# Altium PCB Ups chg.PcbDoc
Units mm, origin at the board's own origin, x right, y up, seen from the top; angles counter-clockwise.
Board outline 41.88 x 53.38 mm, 2 copper layers (Top Layer, Bottom Layer); 29 components, 19 nets, 105 pads, 20 vias.
Unrouted connection lines stored in the file: 1.
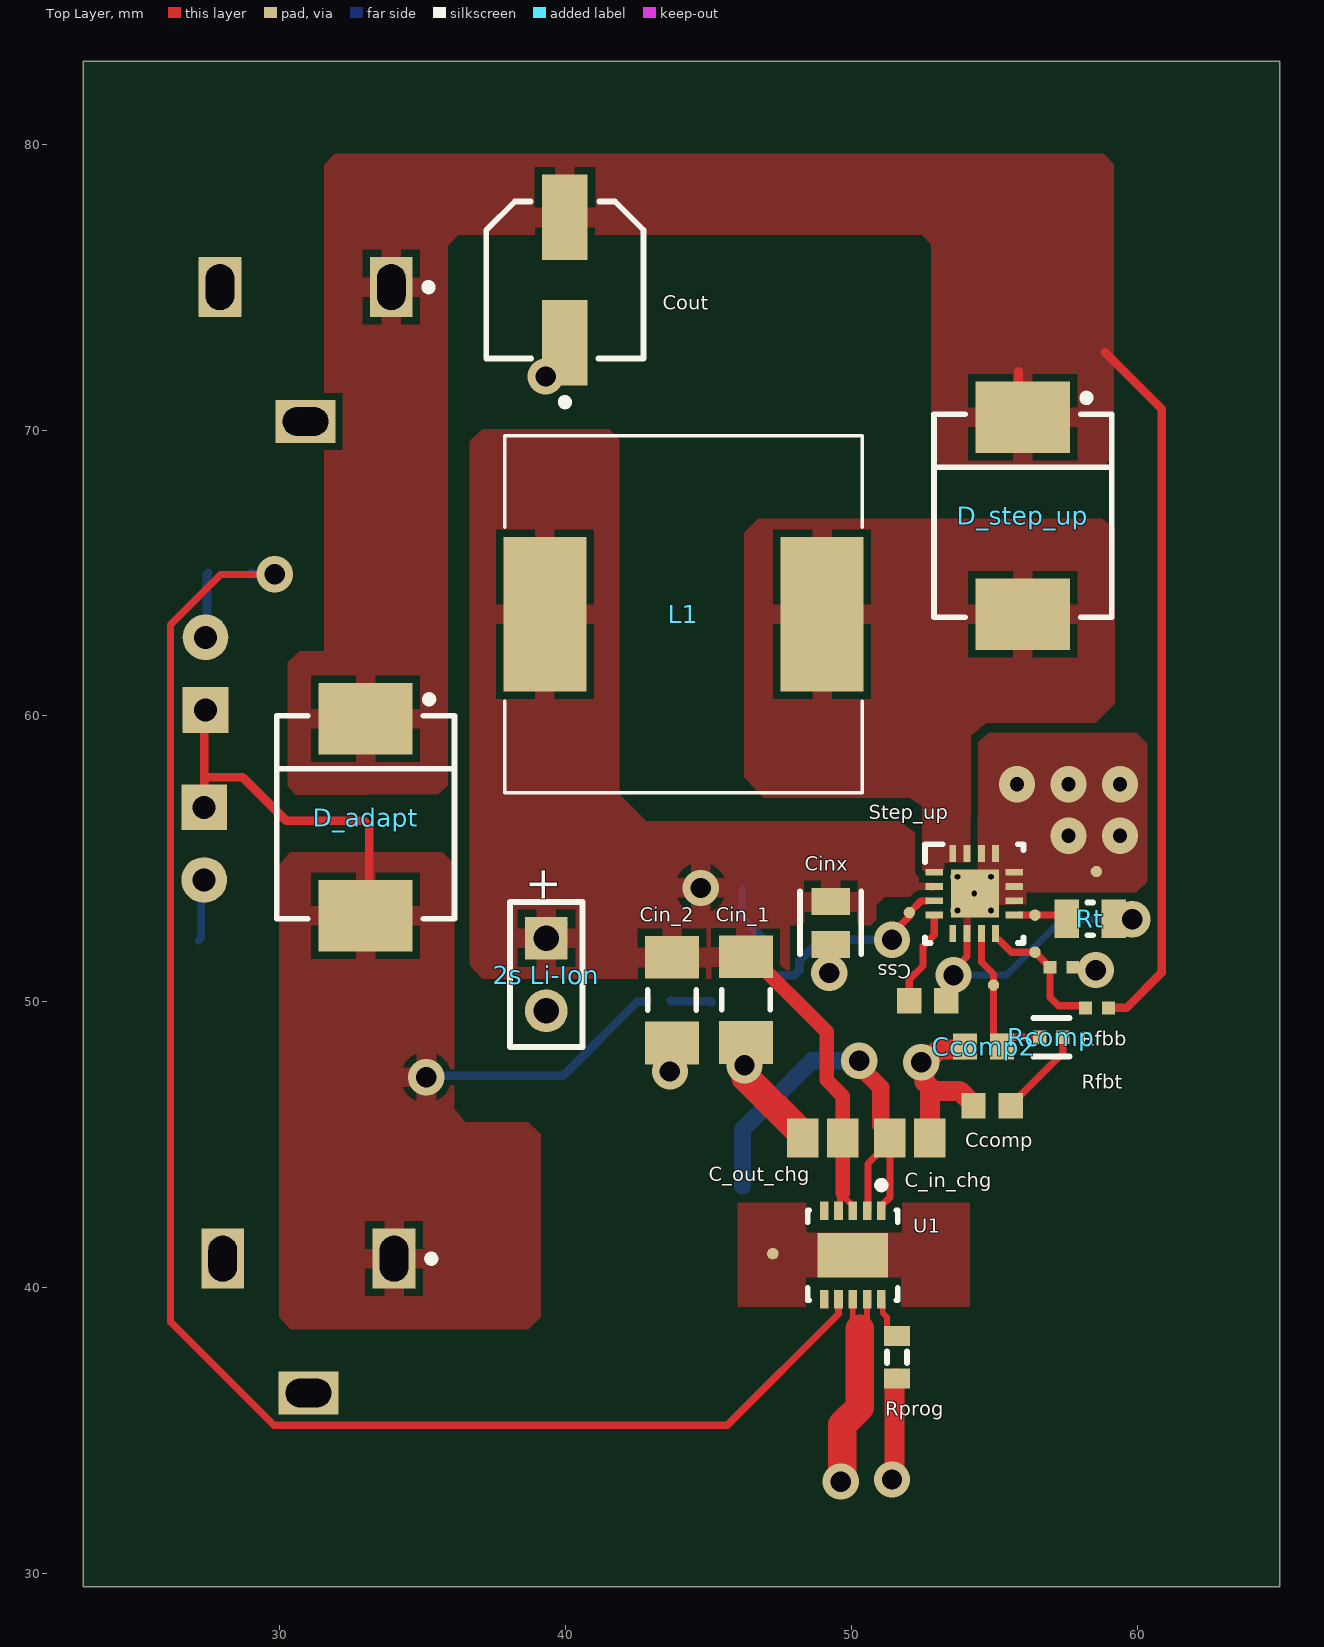
[diagram p0: Top Layer view]
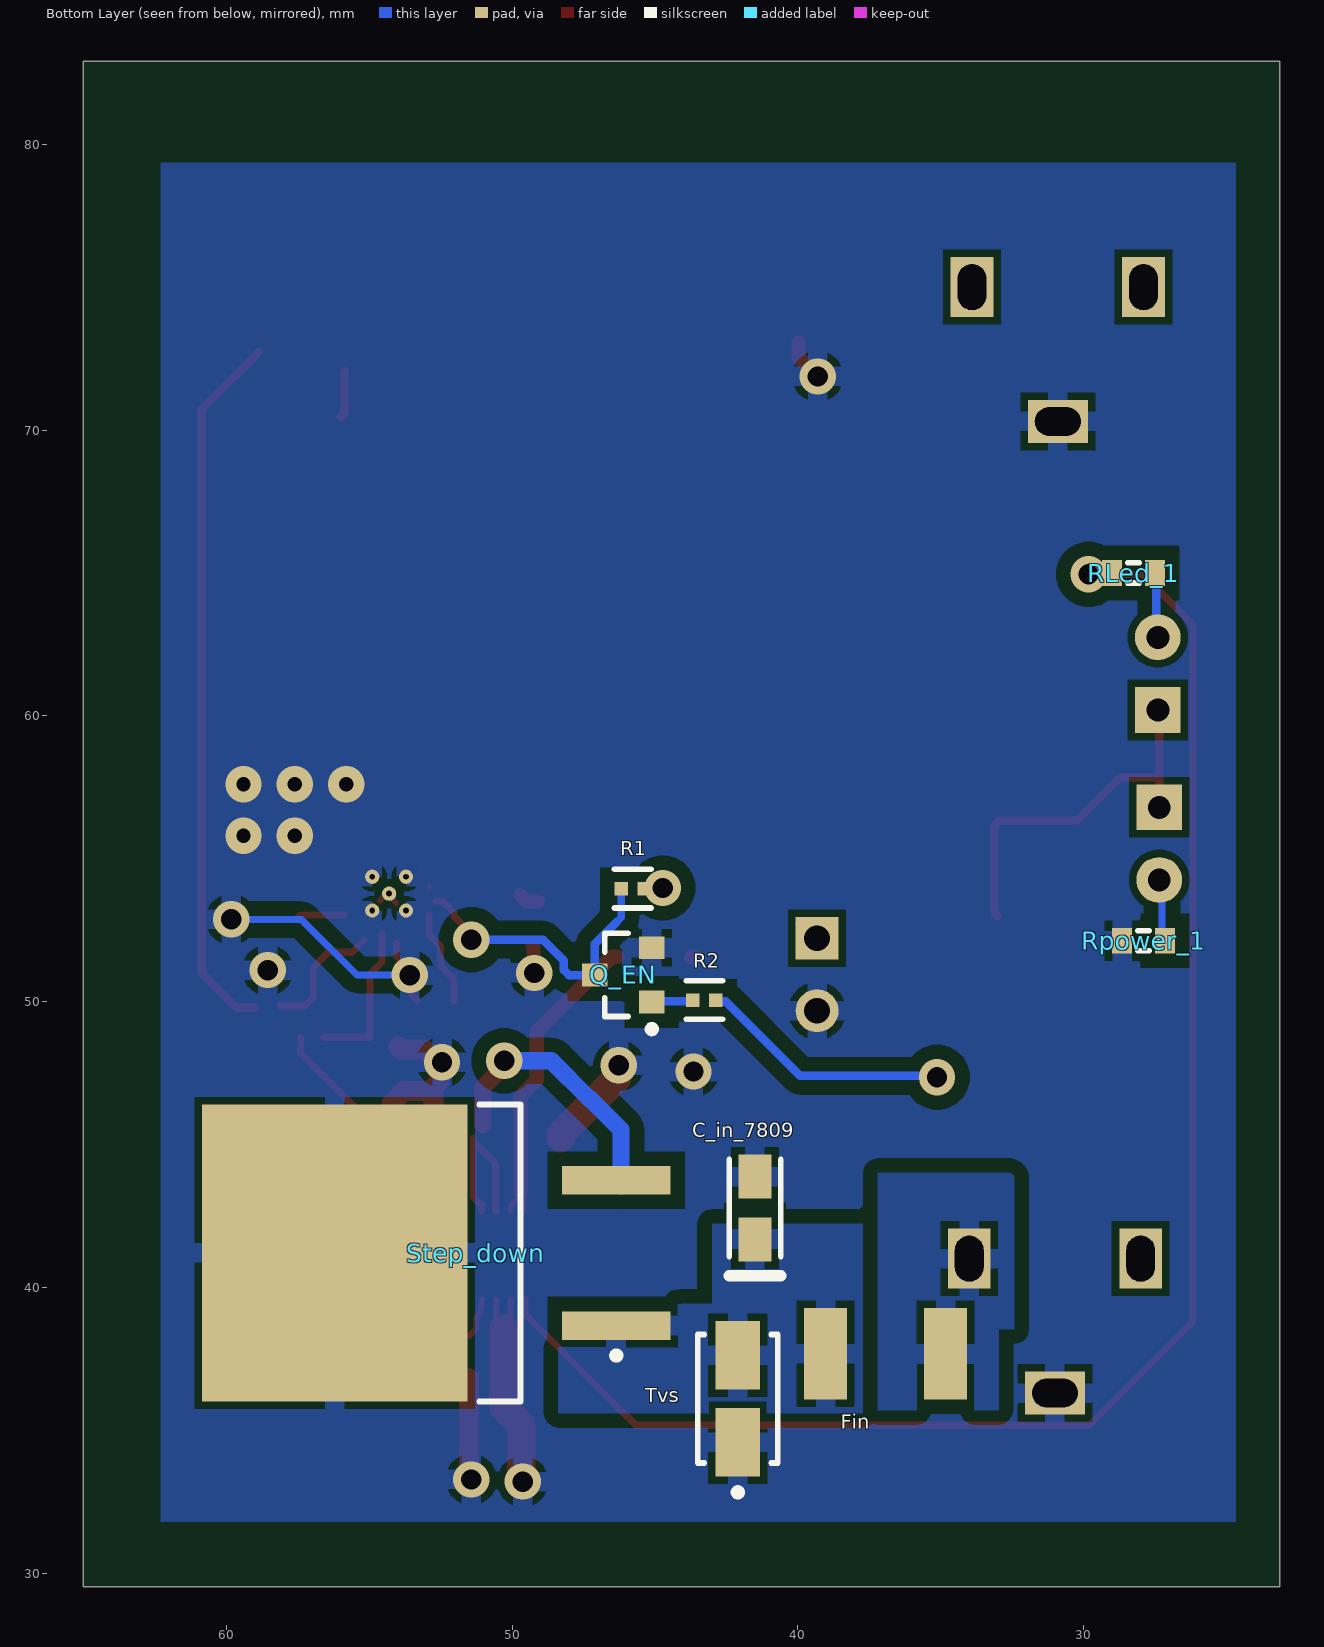
[diagram p1: Bottom Layer view, seen from below]

## Layer stack, top to bottom
Top Solder: solder mask 0.0102, Solder Resist, Dk 3.5
Top Layer: signal copper 0.0356
Dielectric 1: dielectric 0.32, FR-4, Dk 4.8
Bottom Layer: signal copper 0.0356
Bottom Solder: solder mask 0.0102, Solder Resist, Dk 3.5

## Board outline
65,82.9 65,29.525 23.125,29.525 23.125,82.9

## Design rules (kind name [scope] priority, off if disabled: settings)
Clearance "For Bottom_GND" [InNamedPolygon('Bottom_GND')] p1: gap=0.254 ignorepadtopadclearanceinfootprint=TRUE except(0: Arc-Hole Track-Hole SMDPad-Hole THPad-Hole Via-Hole Fill-Hole Poly-Hole Region-Hole Text-Hole; 0.5: Arc-Fill Arc-Poly Arc-Region Track-Fill Track-Poly Track-Region SMDPad-Fill SMDPad-Poly SMDPad-Region Via-Fill Via-Poly Via-Region Fill-Fill Fill-Poly Fill-Region Poly-Poly Poly-Region Region-Region)
Clearance "For SW" [IsNamedPolygon('Bat_Vin_1')] p2: gap=0.254 ignorepadtopadclearanceinfootprint=TRUE except(0.1: Arc-Fill Arc-Poly Arc-Region Track-Fill Track-Poly Track-Region SMDPad-Fill SMDPad-Poly SMDPad-Region THPad-Fill THPad-Poly THPad-Region Via-Fill Via-Poly Via-Region; 0.25: Arc-Hole Track-Hole SMDPad-Hole THPad-Hole Via-Hole Fill-Hole Poly-Hole Region-Hole Text-Hole)
Clearance [All] p3: gap=0.254 ignorepadtopadclearanceinfootprint=TRUE except(0.23: SMDPad-SMDPad; 0.24: SMDPad-Fill SMDPad-Poly SMDPad-Region; 0.25: Arc-Hole Track-Hole SMDPad-Hole THPad-Hole Via-Hole Fill-Hole Poly-Hole Region-Hole Text-Hole)
PolygonConnect "For cool_pad" [All vs IsNamedPolygon('Cool_pad')] p1: connectstyle=Direct reliefconductorwidth=0.254 reliefentries=4 polygonreliefangle="90 Angle" airgapwidth=0.254
PolygonConnect "for Top_GND" [All vs IsNamedPolygon('TOP_GND')] p2: connectstyle=Direct reliefconductorwidth=0.254 reliefentries=4 polygonreliefangle="90 Angle" airgapwidth=0.254
PolygonConnect "For Bat_Vin" [All vs IsNamedPolygon('Bat_Vin_1')] p3: connectstyle=Direct reliefconductorwidth=0.254 reliefentries=4 polygonreliefangle="90 Angle" airgapwidth=0.254
PolygonConnect 0.7mm_conn [All] p4: connectstyle=Relief reliefconductorwidth=0.7 reliefentries=4 polygonreliefangle="90 Angle" airgapwidth=0.254
PolygonConnect [All] p5: connectstyle=Relief reliefconductorwidth=0.254 reliefentries=4 polygonreliefangle="90 Angle" airgapwidth=0.254
RoutingVias [All] p1: holewidth=0.711 width=1.27 viastyle="Through Hole" minholewidth=0.711 minwidth=1.27 maxholewidth=0.711 maxwidth=1.27
SolderMaskExpansion [All] p1: expansion=0.102 istentingtop=FALSE
Width [All] p1: maxlimit=2 minlimit=0.15 preferedwidth=0.5 minimp=50.000000 maximp=50.000000 favimp=50.000000
30 further rules are at their usual default settings.

## Components (designator, comment, footprint, x,y, rotation, side; value= is the part's Value field where it differs from the comment)
"2s Li-Ion" "Battery" BAT-2 39.325,50.945 r270 top
C_in_7809 "T491A475K016AT" KEMT-A-3216-18-2_L 41.5,42.775 r90 bottom
C_in_chg "1uF (25V)" CAPC2013X140X50LL20T25 52.05,45.225 r180 top
C_out_chg "1uF (25V)" CAPC2013X140X50LL20T25 49,45.225 r0 top
Ccomp "06035C102KAT2A" CAPC1608X90X35LL15T15 54.925,46.35 r0 top
Ccomp2 "06035C102KAT2A" CAPC1608X90X35LL15T15 54.625,48.425 r0 top
Cin_1 "C1206C106K4RACTU" CAPC3216X180X50ML20T25 46.31,50.065 r90 top
Cin_2 "C1206C106K4RACTU" CAPC3216X180X50ML20T25 43.725,50.05 r90 top
Cinx "C0805C104M5RACTU" FP-C0805C-DN-MFG 49.275,52.75 r270 top value="0.10 μF"
Cout "2R5SVPE330MY" FP-SVPE-B6-MFG 39.975,75.25 r90 top value=330uF
Css "06035C102KAT2A" CAPC1608X90X35LL15T15 52.675,50.025 r180 top
D_adapt "B540C-13-F" FP-SMC-MFG 33,56.45 r270 top value=300pF
D_step_up "B540C-13-F" FP-SMC-MFG 56,67 r270 top value=300pF
Fin "MF-MSMF075-2" BOUR-MF-MSMF050-2_V 36.925,37.675 r0 bottom
L1 "SRR1260-4R7Y" INDP125125X600N 44.125,63.55 r180 top
Q_EN "2N7002LT1G" ONSC-SOT-23-3-318-08_V 46.108,50.934 r0 bottom
R1 "CRCW04020000Z0ED" FP-CRCW0402-e3-IPC_C 45.775,53.95 r180 bottom
R2 "CRCW04020000Z0ED" FP-CRCW0402-e3-IPC_C 43.271,50.05 r0 bottom
Rcomp "CRCW04020000Z0ED" FP-CRCW0402-e3-IPC_C 57,48.75 r180 top
Rfbb "ERJ2RKF1002X" RESC1005X40X25LL05T05 57.35,51.2 r180 top
Rfbt "ERJ2RKF1002X" RESC1005X40X25LL05T05 58.6,49.775 r0 top
RLed_1 "1K" J1-0603 28.25,65 r0 bottom
Rpower_1 "1K" J1-0603 27.9,52.125 r0 bottom
Rprog "3K" J1-0603 51.6,37.55 r270 top value=1K
Rt "CRCW08050000Z0EA" RESC2013X50X30LL20T20 58.36,52.89 r180 top
Step_down "L7808CD2T-TR" TO-263_N 52.65,41.2 r0 bottom
Step_up "TPS55340RTER" RTE0016C 54.3,53.775 r0 top locked value=Value
Tvs "SMAJ14CA-E3/61" VISH-DO-214AC-2_N 42.1,36.1 r90 bottom
U1 "MCP73213-A6SI/MF" FP-C04-063-MFG 50.05,41.125 r270 top

## Footprints (in the part's own frame and the unit in brackets; to place one, negate y for a bottom-side part, rotate by r counter-clockwise, add the part's x,y. Pads: shape width x height; smd on the part's side, far side on the other; paste and mask are expansions set on the pad)
BAT-2 [mm] "Battery; 2 Leads"
  rect 1.5x1.5 hole 0.9: 1(-1.27,0)
  round 1.5 hole 0.9: 2(1.27,0)
  silkscreen extent -2.54,-1.27 2.54,1.27
BOUR-MF-MSMF050-2_V [mm] "SMD, 2-Leads, Body 4.55x3.24mm"
  rect 1.5x3.2 smd: 1(-2.1,0) 2(2.1,0)
  body extent -2.28,-1.62 2.28,1.62, height 0.85
CAPC1608X90X35LL15T15 [mm] "Chip Capacitor, 2-Leads, Body 1.60x0.81mm, IPC High Density"
  rect 0.85x0.9 smd: 1(-0.65,0) 2(0.65,0)
  body extent -0.88,-0.48 0.87,0.48, height 0.9
CAPC2013X140X50LL20T25 [mm] "Chip Capacitor, 2-Leads, Body 2.00x1.25mm, IPC High Density"
  rect 1.1x1.35 smd: 1(-0.7,0) 2(0.7,0)
  body extent -1.1,-0.72 1.1,0.72, height 1.4
CAPC3216X180X50ML20T25 [mm] "Chip Capacitor, 2-Leads, Body 3.40x1.80mm, IPC Low Density"
  rect 1.5x1.9 smd: 1(-1.5,0) 2(1.5,0)
  silkscreen extent -0.35,-0.85 0.35,0.85, body extent -1.7,-0.9 1.7,0.9, height 1.8
FP-C04-063-MFG [mm]
  rect 0.65x0.3 smd paste+0 mask+0: 1(-1.55,1) 2(-1.55,0.5) 3(-1.55,0) 4(-1.55,-0.5) 5(-1.55,-1) 6(1.55,-1) 7(1.55,-0.5) 8(1.55,0) 9(1.55,0.5) 10(1.55,1)
  rect 1.55x2.48 smd paste+0 mask+0: 11(0,0)
  silkscreen extent -2.57,-1.58 1.57,1.58, body extent -1.52,-1.52 1.52,1.52, height 1
FP-C0805C-DN-MFG [mm]
  rect 0.95x1.35 smd paste+0 mask+0: 1(-0.75,0) 2(0.75,0)
  silkscreen extent -1.1,-1.07 1.1,1.07, body extent -1.4,-0.85 1.4,0.85, height 0.25
FP-CRCW0402-e3-IPC_C [mm]
  rect 0.468x0.472 smd paste+0 mask+0: 1(-0.402,0) 2(0.402,0)
  silkscreen extent -0.64,-0.67 0.64,0.67, body extent -0.5,-0.25 0.5,0.25, height 0.4
FP-SMC-MFG [mm]
  rect 2.5x3.3 smd paste+0 mask+0: 1(-3.45,0) 2(3.45,0)
  silkscreen extent -4.25,-3.11 3.55,3.11, body extent -4.8,-3.21 4.8,3.21, height 0.25
FP-SVPE-B6-MFG [mm]
  rect 3x1.6 smd paste+0 mask+0: 1(-2.2,0) 2(2.2,0)
  silkscreen extent -4.4,-2.75 2.75,2.75, body extent -3.95,-3 3.95,3, height 0.25
INDP125125X600N [mm]
  rect 2.9x5.4 smd: 1(-4.85,0) 2(4.85,0)
  silkscreen extent -6.25,-6.25 6.25,6.25
J1-0603 [mm] "Chip Resistor, Body 1.6x0.8mm, IPC High Density"
  rect 0.7x0.9 smd: 1(-0.75,0) 2(0.75,0)
  silkscreen extent -0.2,-0.35 0.2,0.35, body extent -0.85,-0.48 0.85,0.48, height 0.9
KEMT-A-3216-18-2_L [mm] "Molded TAN Capacitor, 2-Leads, Body 3.4x1.8mm, IPC High Density"
  rect 1.55x1.15 smd: 1(-1.1,0) 2(1.1,0)
  silkscreen extent -2.37,-0.9 1.7,0.9, body extent -1.7,-0.9 1.7,0.9, height 1.8
ONSC-SOT-23-3-318-08_V [mm] "SOT23, 3-Leads, Body 2.92x1.3mm, Pitch 0.95mm"
  rect 0.9x0.8 smd: 1(-1,0.95) 2(-1,-0.95) 3(1,0)
  silkscreen extent -1.12,-1.46 0.65,2.02, body extent -0.65,-1.46 0.65,1.46, height 1.11
RESC1005X40X25LL05T05 [mm] "Chip Resistor, 2-Leads, Body 1.05x0.55mm, IPC High Density"
  rect 0.45x0.45 smd: 1(-0.4,0) 2(0.4,0)
  body extent -0.53,-0.28 0.53,0.28, height 0.4
RESC2013X50X30LL20T20 [mm] "Chip Resistor, 2-Leads, Body 2.00x1.25mm, IPC High Density"
  rect 0.85x1.35 smd: 1(-0.825,0) 2(0.825,0)
  silkscreen extent -0.1,-0.58 0.1,0.58, body extent -1.1,-0.72 1.1,0.72, height 0.5
RTE0016C [mm]
  rect 0.6x0.24 smd paste+0 mask+0.051: 1(-1.4,0.75) 2(-1.4,0.25) 3(-1.4,-0.25) 4(-1.4,-0.75) 9(1.4,-0.75) 10(1.4,-0.25) 11(1.4,0.25) 12(1.4,0.75)
  rect 0.24x0.6 smd paste+0 mask+0.051: 5(-0.75,-1.4) 6(-0.25,-1.4) 7(0.25,-1.4) 8(0.75,-1.4) 13(0.75,1.4) 14(0.25,1.4) 15(-0.25,1.4) 16(-0.75,1.4)
  rect 1.68x1.68 smd paste-0.827 mask+0.051: 17(0.025,0)
  round 0.5 hole 0.203 mask+0.051: 18(0.59,0.59) 19(0.59,-0.59) 20(-0.59,-0.59) 21(-0.59,0.59) 22(0,0)
  silkscreen extent -1.72,-1.72 1.72,1.73, body extent 0,0 0.25,0.25, height 0.25
TO-263_N [mm] "D2-PAK, 4-Leads, Body 9.2x10.2mm, Pitch 2.54mm, Lead Span 15.4mm, IPC Medium Density"
  rect 3.8x1 smd: 1(-6.3,2.54) 3(-6.3,-2.54)
  rect 9.3x10.4 smd: 4(3.55,0)
  silkscreen extent -6.42,-5.2 -1.5,5.2, body extent -2.95,-5.2 6.4,5.2, height 4.6
VISH-DO-214AC-2_N [mm] "DO-214AC, 2-Leads, Body 4.5x2.79mm, IPC Medium Density"
  rect 2.4x1.55 smd: 1(-1.525,0) 2(1.525,0)
  silkscreen extent -3.4,-1.4 2.25,1.4, body extent -2.25,-1.4 2.25,1.39, height 2.29

## Part data
"2s Li-Ion": "Multicell Battery", LatestRevisionDate=17-Jul-2002, LatestRevisionNote="Re-released for DXP Platform.", PackageDescription="Battery; 2 Leads", PackageReference=BAT-2, Published=24-Mar-1999, Publisher="Altium Limited"
C_in_7809: library part CMP-2000-07188-1, "Tantalum Capacitor, 4.7 uF, +/- 10%, 16 V, -55 to 125 degC, 2-Pin Molded, RoHS, Tape and Reel", Capacity (elec.)=4.7µF, Manufacturer=Kemet, Nominal voltage=16V, Package Description="2-Pin Surface Mount Device, Body 3.2 x 1.6 mm", Package Reference=1206, Tolerance=10%, Category=Tantalumcapacitor, Content=1pc(s), Datasheet URL=https://datasheet.ciiva.com/11793/0900766b80718482-11793043.pdf, Datasheet Version=08/2014, Manufacturer URL=http://www.kemet.com/, Mounting Technology=SurfaceMount, Type=T491A475K016AT
C_in_chg C_out_chg: library part CMP-2007-03234-1, Manufacturer=Kemet, Part Number=C0805C105K3RACTU
Ccomp Ccomp2 Css: library part CMP-2006-04378-1, Manufacturer="AVX Interconnect / Elco", Part Number=06035C102KAT2A
Cin_1 Cin_2: library part CMP-1664-00006-1, "CAP, Ceramic, 10 uF, +/- 10%, 16 V, -55 to 125 degC, 1206 (3216 Metric), RoHS, Tape and Reel", Capacitance="8.2 pF", Case Code (Imperial)=0603, Case Code (Metric)=1608, Max Operating Temperature="125 degC", Min Operating Temperature="-55 degC", Package Quantity=4000, Tolerance=5%, Type (Capacitors)=C0G, Voltage Rating="50 V", Case\Package=0603, ComponentLink1Description="Manufacturer URL", ComponentLink1URL=http://www.kemet.com/, ComponentLink2Description=Datasheet, ComponentLink2URL=http://capacitoredge.kemet.com/capedge2/DataSheet/Datasheet-C1206C106K4RACTU.pdf?pn=C1206C106K4RACTU, DatasheetVersion=Aug-16, Height="0.8 mm", Length="1.6 mm", Mount="Surface Mount", PackageDescription="2-Pin Surface Mount Device, Body 3.2 x 1.6 mm", PackageReference=1206, Packaging="Tape and Reel", Pins=2, Radiation Hardening=No, REACH SVHC="No SVHC", RoHSCompliant=true, Voltage Rating (DC)="50 V", Width="0.8 mm"
Cinx: library part CMP-1036-04423-3, "CAP CER 0.1UF 50V X7R 0805", Capacitance="0.10 μF", Manufacturer=KEMET, Package=C0805C-DN, Temperature="-55°C to +125°C", Temperature Characteristic=X7R, Temperature Coefficient=30ppm/°C, Temperature Range High=+125°C, Temperature Range Low=-55°C, Tolerance=0.2, Voltage Rating="50 V", Automotive=No, Category=Cap, ComponentLink2Description=Datasheet, ComponentLink2URL=https://content.kemet.com/datasheets/KEM_C1003_C0G_SMD.pdf, Device Class L1="Passive Components", Device Class L2=Capacitors, Device Class L3="Ceramic Capacitors", Digikey Description="CAP CER 0.1UF 50V X7R 0805", Height=0.88mm, Ipc Land Pattern Name=CAPC200125X78, Lead Free=Yes, Manufacturer Part Number=C0805C104M5RACTU, Material=Ceramic, Mouser Description="Multilayer Ceramic Capacitors MLCC - SMD/SMT 50volts 0.1uF X7R 20%", Octopart=https://octopart.com/c0805c104m5ractu-kemet-129379, RoHS=TRUE
Cout: library part CMP-05428-000004-1, "CAP ALUM POLY 330UF 20% 2.5V SMD", Capacitance=330uF, Leakage Current=500uA, Manufacturer=Panasonic, Package=SVPE-B6, Ripple Current=3860mA, Temperature="-55°C to +105°C", Temperature Range High=+105°C, Temperature Range Low=-55°C, Tolerance=20%, Voltage Rating=2.5V, Automotive=No, Category=Cap, ComponentLink2Description=Datasheet, ComponentLink2URL=https://industrial.panasonic.com/cdbs/www-data/pdf/AAB8000/AAB8000C179.pdf, Device Class L1="Passive Components", Device Class L2=Capacitors, Device Class L3="Polymer Capacitors", Digikey Description="CAP ALUM POLY 330UF 20% 2.5V SMD", Dissipation Factor=12%, ESR=10mΩ, Footprint Url=https://industrial.panasonic.com/cdbs/www-data/pdf/AAB8000/AAB8000COL10.pdf, Height=6mm, Lead Free=Yes, Life=2000Hours, Manufacturer Part Number=2R5SVPE330MY, Material=Polymer, Mouser Description="Cap Aluminum Polymer 330uF 2.5VDC 20% (5 X 5.9mm) SMD 0.01 Ohm 3860mA 2000h 105C T/R", Octopart=https://octopart.com/2r5svpe330my-panasonic-29498404, RoHS=TRUE
D_adapt D_step_up: library part CMP-2000-05097-3, "DIODE SCHOTTKY 40V 5A SMC", Capacitance=300pF, Forward Current=5A, Manufacturer="Diodes Inc.", Max Junction Temp=+150°C, Max Repetitive Reverse Voltage=40V, Max Surge Forward Current=100A, Package=SMC, Peak Reverse Current=0.5mA, Temperature="-55°C to +150°C", Temperature Range Low=-55°C, Automotive=No, Automotive Grade=NA, Category=Diode, ComponentLink2Description=Datasheet, ComponentLink2URL=https://www.diodes.com/assets/Datasheets/ds13012.pdf, Device Class L1="Discrete Semiconductors", Device Class L2=Diodes, Device Class L3="Schottky Diodes", Digikey Description="DIODE SCHOTTKY 40V 5A SMC", Footprint Url=https://www.diodes.com/assets/Package-Files/SMC.pdf, Height=2.5mm, Lead Free=Yes, Manufacturer Part Number=B540C-13-F, Mouser Description="Diode: Schottky rectifying; SMD; 40V; 5A; SMC; Package: reel, tape", Octopart=https://octopart.com/b540c-13-f-diodes+inc.-325873, Reverse Voltage=40V, RoHS=TRUE, Standoff Height=0.1mm, Temperature Range High=+150°C
Fin: library part CMP-2100-03654-1, "PTC Resettable Fuse, 13.2 V, 750 mA, -40 to 85 degC, 2-Pin SMD, RoHS, Tape and Reel", Case Code (Imperial)=1812, Case Code (Metric)=4532, Current Rating=100A, Manufacturer=Bourns, Max Operating Temperature=85degC, Min Operating Temperature=-40degC, Package Description="2-Pin Surface Mount Device, Body 4.55 x 3.24 mm", Package Quantity=2000, Package Reference=MF-MSMF050-2, Power Dissipation=800mW, Resistance=450mOhm, Supply Voltage=13.2V, Case/Package=1812, Datasheet URL=http://www.bourns.com/docs/Product-Datasheets/mfmsmf.pdf, Datasheet Version="Rev. AG, 08/2016", Height=0.85mm, Lead Free=LeadFree, Length=4.73mm, Manufacturer URL=http://www.bourns.com/, Max Current Rating=100A, Mount=SurfaceMount, Number of Terminals=2, Packaging=TapeandReel, Radiation Hardening=No, REACH SVHC=NoSVHC, RoHSCompliant=true, Termination=SMD/SMT, Voltage Rating=13.2V, Voltage Rating (DC)=13.2V, Width=3.41mm
L1: "4.7ÂµH Shielded Wirewound Inductor 6.8A 15.5mOhm Max Nonstandard", Package="Nonstandard Bourns", Availability=Warning, Check_prices=https://www.snapeda.com/parts/SRR1260-4R7Y/Bourns/view-part/587861/?ref=eda, MF=Bourns, MP=SRR1260-4R7Y, Price=None, Purchase-URL=https://pricing.snapeda.com/search/part/SRR1260-4R7Y/?ref=eda, SnapEDA_Link=https://www.snapeda.com/parts/SRR1260-4R7Y/Bourns/view-part/587861/?ref=snap
Q_EN: library part CMP-1058-00781-1, "Small Signal MOSFET, 60 V, 115 mA, N-Channel, 3-Pin SOT-23, Pb-Free, Tape and Reel", Manufacturer="On Semiconductor", Package Type=SOT-23-3, Channel Polarity="N Channel", ComponentLink1Description="Manufacturer URL", ComponentLink1URL=http://www.onsemi.com/, ComponentLink2Description=Datasheet, ComponentLink2URL=http://www.onsemi.com/pub_link/Collateral/2N7002L-D.PDF, ComponentLink3Description="Package Specification", ComponentLink3URL=http://www.onsemi.cn/pub_link/Collateral/318-08.PDF, Configuration=Single, DatasheetVersion="Rev. 7", ID Max (A)=0.115, Mounting Technology="Surface Mount", PackageDescription="3-Pin Small Outline Transistor, Body 2.92 x 1.3 mm, Pitch 0.95 mm", PackageReference=SOT-23-3-318-08, PackageVersion="Rev. AP, 11/2009", Packing="Tape and Reel", PartNumber=2N7002LT1G, RoHS=Pb-Free, V(BR)DSS Min (V)=60, VGS Max (V)=20, VGS(th) Max (V)=2.5
R1 R2 Rcomp: library part CMP-2002-08122-2, "RES Thick Film, 0Ω, 0.063W, 0402", Case Code (Imperial)=0402, Case Code (Metric)=1005, Max Operating Temperature=155°C, Max Power Dissipation=63mW, Min Operating Temperature=-55°C, Package Quantity=1, Resistance=0mR, Temperature Coefficient=100ppm/°C, Tolerance=5%, Voltage Rating=50V, Case/Package=0402, Composition="Thick Film", Contact Plating=Tin, Depth=0.5mm, Features="Automotive AEC-Q200", Height=0.35mm, Lead Free="Lead Free", Length=1mm, Military Standard=Not, Mount="Surface Mount", Number of Terminations=2, Packaging="Tape and Reel", Power Rating=63mW, Radiation Hardening=No, Termination=SMD/SMT, Voltage Rating (DC)=50V, Weight=2.3E-05oz, Width=0.5mm
Rfbb Rfbt: library part CMP-2000-07588-1, "Chip Resistor, 10 KOhm, +/- 1%, 0.1 W, -55 to 155 degC, 0402 (1005 Metric), RoHS, Tape and Reel", Case Code (Imperial)=0402, Case Code (Metric)=1005, Manufacturer=Panasonic, Max Operating Temperature=155degC, Max Power Dissipation=100mW, Min Operating Temperature=-55degC, Package Description="2-Pin Surface Mount Device, Body 1 x 0.5 mm", Package Quantity=1, Package Reference=402, Resistance=10KOhm, Temperature Coefficient=100ppm\/degreesC, Tolerance=1%, Voltage Rating=50V, Case\/Package=0402, Composition=ThickFilm, Contact Plating=Tin, Datasheet URL=https://industrial.panasonic.com/cdbs/www-data/pdf/RDA0000/AOA0000C304.pdf, Datasheet Version=02/2017, Depth=0.5mm, Height=0.35mm, Lead Free=LeadFree, Length=1mm, Manufacturer URL=http://www.panasonic.com/, Military Standard=Not, Mount=SurfaceMount, Mounting Technology=SurfaceMount, Number of Pins=2, Number of Terminations=2, Packaging=TapeandReel, Power Rating=100mW, Radiation Hardening=No, REACH SVHC=NoSVHC, RoHSCompliant=True, Termination=SMD/SMT, Voltage Rating (DC)=50V, Width=0.02inch
RLed_1 Rpower_1 Rprog: library part Res3, "Resistor", LatestRevisionDate=29-May-2009, LatestRevisionNote="IPC-7351 Footprint Added.", PackageDescription="Chip Resistor", PackageReference=J1-0603, Published=8-Jun-2000, Publisher="Altium Limited"
Rt: library part CMP-2001-04896-1, Manufacturer="Vishay Dale", Part Number=CRCW08050000Z0EA
Step_down: library part CMP-0244-00209-1, "Positive Voltage Regulator, 3-Pin D2PAK, Tape and Reel", ComponentLink1Description="Manufacturer URL", ComponentLink1URL=http://www.st.com, ComponentLink2Description=Datasheet, ComponentLink2URL=http://www.st.com/internet/com/TECHNICAL_RESOURCES/TECHNICAL_LITERATURE/DATASHEET/CD00000444.pdf, DatasheetVersion=16/11/2011, PackageDescription="3-Pin Transistor Outline Package 2.54 mm Pitch, 15.4 mm Lead Span (D2PAK)", PackageReference=TO-263, PackageVersion=2011
Step_up: "No Description Available", Manufacturer="Texas Instruments", Copyright="Copyright (C) 2018 Accelerated Designs. All rights reserved", PartNumber=TPS55340RTER, RefDes=RefDes, Type=DEV
Tvs: library part CMP-0548-00182-2, "Transient Voltage Suppressor, 6.40 to 231 V, 14 V Stand-off Voltage, Bi-Directional, -55 to 155 degC, 2-pin DO-214AC, Pb-Free, Tape and Reel", Manufacturer="Vishay Semiconductor", Operating Junction and Storage Temperature Range="-55 to 150 degC", ComponentLink1Description="Manufacturer URL", ComponentLink1URL=http://www.vishay.com/, ComponentLink2Description=Datasheet, ComponentLink2URL=http://www.vishay.com/docs/88390/smaj50a.pdf, ComponentLink3Description="Package Specification", ComponentLink3URL=http://www.vishay.com/docs/88390/smaj50a.pdf, DatasheetVersion=12/8/2013, ID (uA)=2, IFSM="40 A", Mounting Technology="Surface Mount", PackageDescription="2-Pin DO-214AC (SMA), Body 4.245 x 2.665 mm", PackageReference=DO-214AC-2, Packing="Tape and Reel", PartNumber=SMAJ14CA-E3/61, PPPM (W)="400, 300", RoHS=TRUE, VBR Bi-Directional (V)="6.4 to 231", VWM (V)=14
U1: library part CMP-0133-00131-2, "IC LI-ION/LI-POLY CTRLR 10-DFN", Case/Package=DFN, Drain to Source Resistance=350mR, Max Charge Current=1.1A, Max Input Voltage=18V, Max Operating Temperature=85°C, Max Output Voltage=8.85V, Max Supply Voltage=13V, Min Operating Temperature=-40°C, Min Output Voltage=8.15V, Min Supply Voltage=4.2V, Operating Supply Current=700uA, Output Voltage=8.4V, Package Quantity=120, Height=0.037inch, Lead Free="Lead Free", Length=0.118inch, Max Output Current=1.1A, Mount="Surface Mount", Number of Cells=2, Number of Channels=2, Number of Pins=10, Packaging=Rail/Tube, Radiation Hardening=No, REACH SVHC="No SVHC", Voltage Rating=8.85V, Width=0.118inch

## Free pads (board coordinates)
  rect 1.6x1.6 hole 0.8: 1(27.35,56.795) 1(27.4,60.205)
  rect 1.5x2.1 hole 1 slot 1.6 at 90 deg: 1(33.9,75) 1(34,41) 2(27.9,75) 2(28,41)
  round 1.6 hole 0.8: 2(27.35,54.255) 2(27.4,62.745)
  rect 2.1x1.5 hole 1 slot 1.6 at 0 deg: 3(30.9,70.3) 3(31,36.3)
  round 0.4 smd mask+0: 4(47.25,41.175) 5(58.575,54.55)
  round 0.4 smd paste+0 mask+0: 6(52.032,53.113) 6(54.975,50.575) 6(56.425,51.725) 6(56.425,53.025)

## Via types
v1: diameter 1.27, hole 0.711, Top Layer to Bottom Layer, 15 vias
v2: diameter 1.27, hole 0.5, Top Layer to Bottom Layer, 5 vias

## Nets (pads, with @x,y where several pads share a name; then routed paths per layer and width w, separated by ;. In a path a pad name is that pad's centre, name@x,y a point inside that pad or via, vN(x,y) a via of type N, cw(c..) or ccw(c..) an arc to the next point about the centre after c; other vN are vias at no path point)
+9: C_in_chg.2 Step_down.3 U1.1 U1.2 | length 15.2
  Top Layer w0.25: U1.2 50.575,42.7 50.575,42.875 50.579,42.879 50.579,44.329 51.35,45.1 C_in_chg.2 51.35,43.15 51.075,42.875 51.075,42.7 U1.1
  Top Layer w0.6: v1(50.275,47.925) 50.275,47.744 51.027,46.992 C_in_chg.2@51.027,45.673
  Bottom Layer w0.6: Step_down.3@46.186,43.54 46.186,45.511 47.264,46.589 47.289,46.589 48.625,47.925 v1(50.275,47.925)
+12: D_adapt.2 Fin.1 pad.1@27.4,60.205 pad.1@27.35,56.795 pad.1@34,41 R2.1 | length 22
  Top Layer w0.3: pad.1@27.35,56.795 27.35,57.845 ; pad.1@27.4,60.205 27.35,60.155 27.35,58.25 27.35,57.845 ; D_adapt.2 33.125,53.125 33.125,56.149 32.949,56.325 30.225,56.325 28.705,57.845 27.35,57.845
  Bottom Layer w0.3: v1(35.125,47.35) 35.175,47.4 39.918,47.4 42.518,50 42.819,50 R2.1
Battery_op: "2s Li-Ion.1" C_out_chg.2 Cin_1.2 Cin_2.2 Cinx.1 L1.2 R1.2 Step_up.2 U1.3 U1.4 | length 12.8
  Top Layer w0.2: U1.4 49.6,42.725 49.6,43.1 49.7,43.2 ; 49.7,43.303 49.7,43.2 ; U1.3 50.05,42.85 49.7,43.2
  Top Layer w0.5: 39.325,52.215 39.825,52.715 ; Cin_2.2@43.525,51.55 Cin_2.2 ; Cin_1.2 46.51,51.565 49.136,48.939 49.136,47.253 49.7,46.689 C_out_chg.2 49.7,43.303 ; Cinx.1@49.075,53.5 Cinx.1 49.475,53.5 Cinx.1@49.7,53.725
  other v1: 44.725,53.975
Comp: Ccomp2.2 pad.6@54.975,50.575 Rcomp.2 Step_up.7 | length 5.4
  Top Layer w0.25: Step_up.7 54.551,52.374 54.551,51.383 54.975,50.959 54.975,48.75 Rcomp.2
Cool: pad.4 U1.11
EN: pad.6@52.032,53.113 Q_EN.3 R1.1 Step_up.3 | length 10.4
  Top Layer w0.25: v1(51.425,52.163) 51.425,52.378 52.032,52.985 52.032,53.113 52.443,53.524 Step_up.3@52.65,53.524
  Bottom Layer w0.25: R1.1 46.177,52.946 46.336,52.786
  Bottom Layer w0.3: 46.336,52.786 47.108,52.015 Q_EN.3 47.117,50.925 48.008,50.925 48.186,51.103 48.186,51.43 48.919,52.163 v1(51.425,52.163)
FB: pad.6@56.425,51.725 Rfbb.2 Rfbt.1 Step_up.8 | length 4.5
  Top Layer w0.25: 55.175,52.15 55.6,51.725 56.425,51.725 Rfbb.2 56.95,50.15 57.25,49.85 Rfbt.1@58.125,49.85
Freq: pad.6@56.425,53.025 Rt.2 Step_up.9 | length 1.7
  Top Layer w0.25: Step_up.9@55.875,53.025 57.4,53.025 Rt.2
GND: "2s Li-Ion.2" C_in_7809.2 C_in_chg.1 C_out_chg.1 Ccomp2.1 Ccomp.1 Cin_1.1 Cin_2.1 Cinx.2 Cout.1 Css.1 pad.3 pad.5 Q_EN.2 Rfbb.1 Rpower_1.2 Rprog.2 Rt.1 Step_down.4 Step_up.6 Step_up.10 Step_up.11 Step_up.12 Step_up.13 Step_up.14 Step_up.17 Step_up.18 Step_up.19 Step_up.20 Step_up.21 Step_up.22 Tvs.1 U1.8 U1.9 | length 34.2
  Top Layer w0.2: U1.8 50.05,38.725 50.204,38.571 ; 50.55,38.917 U1.9 ; Step_up.17@54.05,53.444 54.325,53.719 Step_up.17 54.381,53.775 Step_up.17@54.631,53.525
  Top Layer w0.25: 50.3,38.552 50.3,38.667 ; Css.1 53.575,50.35 v1(53.575,50.925) 53.575,51.1 54.047,51.572 54.047,52.036 ; Rt.1 59.81,52.89 v1(59.825,52.875)
  Top Layer w0.5: v1(39.3,71.875) 39.975,72.55 Cout.1 ; v1(49.225,51) 49.25,51.025 49.25,51.975 Cinx.2
  Top Layer w0.7: v1(51.425,33.275) 51.513,33.363 51.513,36.8 Rprog.2 ; v1(52.45,47.875) 52.559,47.766 52.559,47.189 52.75,46.998 ; v1@52.541,47.784 52.541,47.812 53.054,48.325 53.9,48.325 53.975,48.4 Ccomp2.1 ; C_in_chg.1 52.75,46.998 ; Ccomp.1@54.2,46.275 54.2,46.465 53.79,46.875 52.873,46.875 52.75,46.998
  Top Layer w1: v1(46.262,47.766) 46.313,47.714 46.313,47.337 48.3,45.35 C_out_chg.1 ; v1(49.625,33.2) 49.677,33.252 49.677,35.184 50.3,35.807 50.3,38.552
  Bottom Layer w0.25: v1(53.575,50.925) 55.425,50.925 57.375,52.875 v1(59.825,52.875)
  other v1: 43.65,47.55 58.55,51.1
  other v2: 57.6,55.8 59.4,55.8 55.8,57.6 57.6,57.6 59.4,57.6
Load: Cout.2 D_adapt.1 D_step_up.1 pad.1@33.9,75 Rfbt.2 | length 26.6
  Top Layer w0.3: 55.85,72.05 55.85,70.6 D_step_up.1 ; 58.875,72.725 60.864,70.736 60.864,51.012 59.627,49.775 Rfbt.2
NetC_in_7809_1: C_in_7809.1 Fin.2 Step_down.1 Tvs.2
NetCcomp_2: Ccomp.2 Rcomp.1 | length 3.2
  Top Layer w0.25: Ccomp.2 55.575,46.375 56.638,47.438 56.64,47.438 57.402,48.2 Rcomp.1
NetD_chg_2: pad.2@27.4,62.745 RLed_1.1 | length 2.3
  Bottom Layer w0.3: pad.2@27.4,62.745 27.45,62.795 27.45,64.95 RLed_1.1
NetD_step_up_2: D_step_up.2 L1.1 Step_up.1 Step_up.15 Step_up.16
"NetPower Good_2": pad.2@27.35,54.255 Rpower_1.1 | length 2.2
  Bottom Layer w0.25: Rpower_1.1 27.25,52.225 27.25,54.155 pad.2@27.35,54.255
NetQ_EN_1: Q_EN.1 R2.2 | length 1.5
  Bottom Layer w0.3: R2.2 43.706,50.017 45.075,50.017 Q_EN.1
NetRLed_1_2: RLed_1.2 U1.7 | length 56.6
  Top Layer w0.25: v1(29.825,64.95) 27.938,64.95 26.171,63.183 26.171,38.793 29.793,35.171 45.657,35.171 49.55,39.064 U1.7
  Bottom Layer w0.3: RLed_1.2 29.05,64.95 v1(29.825,64.95)
Prog: Rprog.1 U1.10 | length 1.8
  Top Layer w0.2: U1.10 51.05,39.4 51.1,39.35 51.1,39.1 51.25,38.95 51.25,38.55 51.5,38.3 Rprog.1@51.8,38.3
SS: Css.2 Step_up.4 | length 3.4
  Top Layer w0.25: Css.2 52.025,50.766 52.504,51.245 52.504,51.934 52.9,52.33 Step_up.4
pads on no net: Step_up.5 U1.5 U1.6

## Polygon pours and split planes (outlines as drawn)
Load on Top Layer "Top Layer-Load" (solid, pour order 16): 53.25,68.65 52.8,69.1 52.8,76.487 52.462,76.825 36.25,76.825 35.875,76.45 35.875,57.575 35.55,57.25 30.575,57.225 30.275,57.525 30.275,61.867 30.693,62.25 31.55,62.25 31.55,79.275 31.925,79.675 32.075,79.675 58.825,79.675 59.175,79.3 59.175,69.1 58.725,68.65
Cool on Top Layer "Cool_pad" (solid, pour order 23): 46.025,39.325 46.45,39.325 48.4,39.325 48.4,40.35 50.05,40.35 51.75,40.35 51.75,39.325 52.4,39.325 54.15,39.325 54.15,42.95 53.725,42.95 51.775,42.95 51.775,41.9 49.65,41.9 48.425,41.9 48.425,42.95 47.775,42.95 46.025,42.95
+12 on Top Layer "NONET_L02_P-001" (solid, pour order 4): 30.375,38.525 29.975,38.95 29.975,51.175 29.975,54.778 30.372,55.225 35.675,55.225 36.1,54.8 36.1,46.256 36.485,45.775 38.7,45.775 39.125,45.35 39.125,38.95 38.7,38.525 32.425,38.525 32.325,38.525
GND on Top Layer "TOP_GND" (solid, remove dead copper, pour order 18): 59.975,53.825 60.35,54.2 60.35,59.025 59.975,59.4 54.825,59.4 54.503,59.147 54.431,59.075 54.422,54.6 53.55,54.6 53.55,52.95 53.925,52.95 53.925,52.075 54.175,52.075 54.175,52.925 54.2,52.95 54.418,52.95 55.15,52.95 55.15,53.35 56.125,53.35 56.125,53.825
Battery_op on Top Layer "NONET_L02_P-001" (solid, remove dead copper, pour order 17): 52.825,55.456 51.7,56.3 42.825,56.3 41.875,57.25 41.875,69.675 41.525,70.025 37.075,70.025 36.65,69.6 36.65,51.275 37.075,50.8 47.825,50.8 47.85,50.825 47.85,52.675 50.85,52.675 50.875,52.65 50.875,53.4 50.9,53.4 51.175,53.665 53.35,53.688 53.35,54.3 52.825,54.3
NetD_step_up_2 on Top Layer "Bat_Vin_1" (solid, pour order 19): 52.475,56.825 52.475,54.525 53.225,54.525 53.225,54.65 53.45,54.875 54.175,54.875 54.175,56.825
NetD_step_up_2 on Top Layer "Bat_vin" (solid, remove dead copper, pour order 0): 52.475,56.825 52.05,57.125 46.939,57.125 46.25,57.846 46.25,66.4 46.75,66.9 58.775,66.9 59.225,66.55 59.225,60.425 58.55,59.75 54.725,59.75 54.175,59.3 54.175,56.825
GND on Bottom Layer "Bottom_GND" (solid, remove dead copper, pour order 13): 24.675,31.8 62.3,31.8 62.3,79.35 24.675,79.35
+12 on Bottom Layer "Bottom Layer-+12" (solid, pour order 9): 32.975,35.7 37.2,35.7 37.2,44 32.45,44 32.425,43.975 32.425,38.525 32.975,38.525
NetC_in_7809_1 on Bottom Layer "12V_fused" (solid, remove dead copper, pour order 5): 37.725,42.225 37.725,35.6 48.375,35.6 48.375,39.425 43.025,39.425 43,39.45 43,42.225

## Silkscreen, mask and mechanical layers (free items; w line width, h text height)
Top Overlay:
  circle w0.25: c35.2,75 r0.125
  circle w0.25: c35.3,41 r0.125
Mechanical 1:
  lines w1: 24.025,30.875 63.575,30.875 63.575,81.201 24.025,81.201 24.025,30.875
  text "All dimensions in mm" at 65.804,81.629 h1.52
  text "Mechanical 1 contains board Cut Out" at 65.929,79.304 h1.52
  text "Dim: 40 X 52" at 65.979,75.904 h1.52
  text "Package Info: / Step_up: 16 pin WQFN / U1: 3 X 3 DFN" at 65.4,66.925 h1.52
  text "Board Thickness: 1.6" at 65.704,63.579 h1.52
  text "SolderMask: Green" at 65.754,60.354 h1.52
  text "Hole tolerance: +/- 10%" at 65.904,56.929 h1.52
Top Courtyard:
  text "Power In" at 29.05,34.55 h0.5
Mechanical 13:
  lines w0.1: 20.2,70.5 34.6,70.5 34.6,79.5 20.2,79.5 20.2,70.5 ; 20.3,36.5 34.7,36.5 34.7,45.5 20.3,45.5 20.3,36.5
Mechanical 15:
  lines w0.05: 20.1,69.45 20.1,79.6 34.75,79.6 34.75,69.45 20.1,69.45 ; 20.2,35.45 20.2,45.6 34.85,45.6 34.85,35.45 20.2,35.45
  lines w0.1: 30.4,75 31.4,75 ; 30.5,41 31.5,41 ; 30.9,74.5 30.9,75.5 ; 31,40.5 31,41.5

## Text inside footprints (layer, text, board x,y; h text height)
"2s Li-Ion": Top Overlay "+" at 38.75,54.75 h1.15 r270